# Altium PCB HUB_PCB.PcbDoc
Units mil, origin at the board's own origin, x right, y up, seen from the top; angles counter-clockwise.
Board outline 6000 x 4000 mil, 2 copper layers (Top Layer, Bottom Layer), stack 12.8 mil thick; 64 components, 54 nets, 260 pads, 25 vias.
Unrouted connection lines stored in the file: 176.
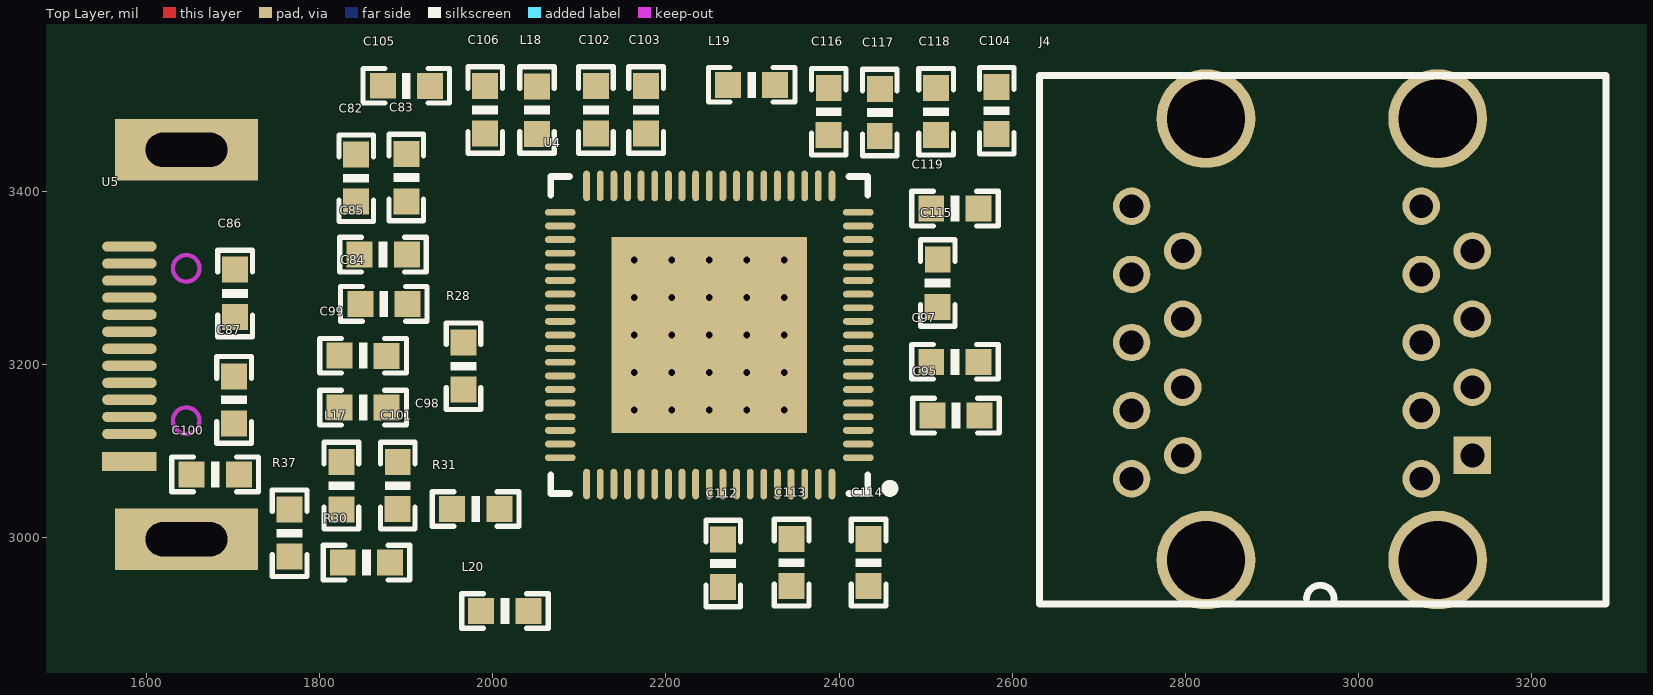
[diagram p0: Top Layer view]
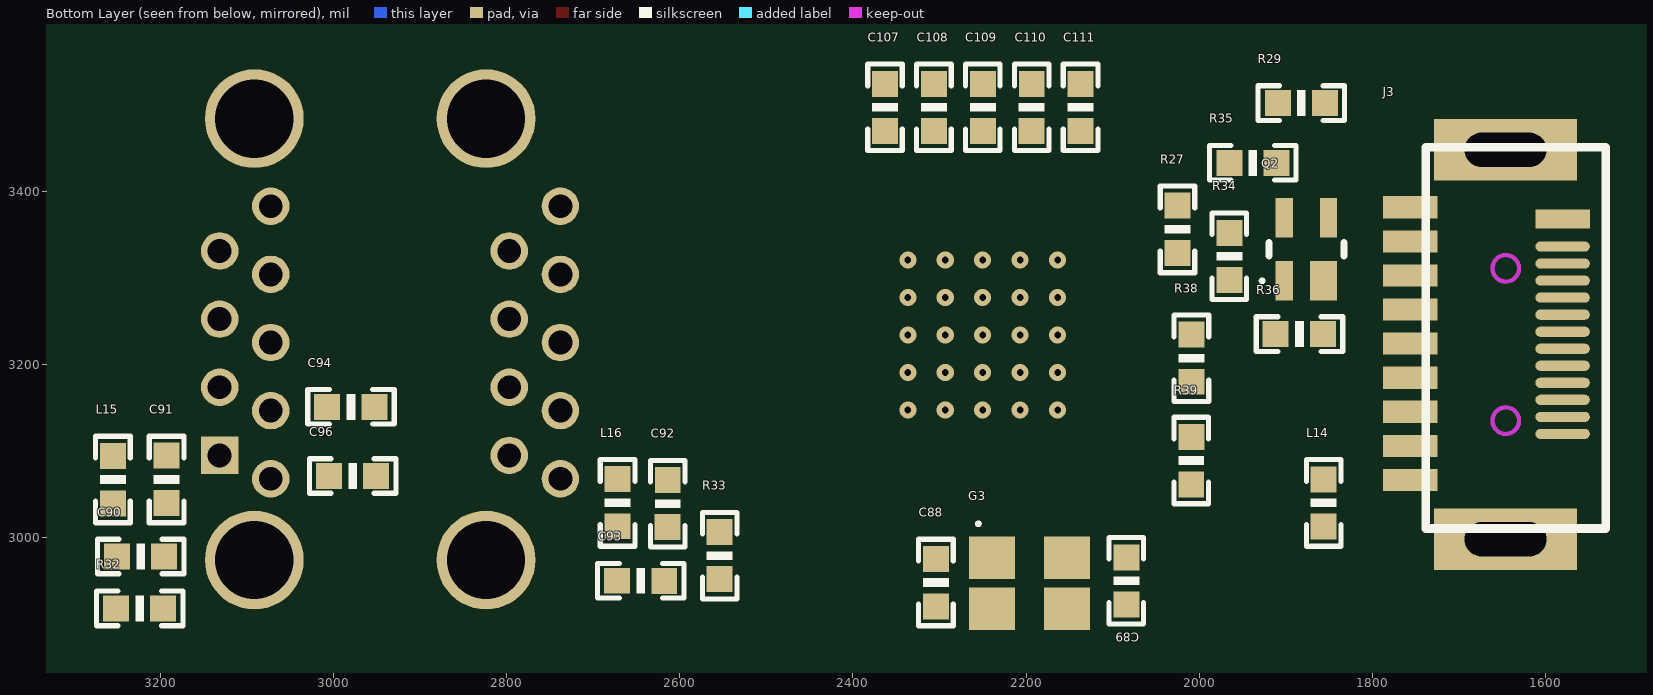
[diagram p1: Bottom Layer view, seen from below]

## Layer stack, top to bottom
Top Solder: solder mask 0.4, Solder Resist, Dk 3.5
Top Layer: signal copper 1.4
Dielectric 1: core 10, FR-4, Dk 4.2
Bottom Layer: signal copper 1.4
Bottom Solder: solder mask 0.4, Solder Resist, Dk 3.5

## Board outline
1000,1000 7000,1000 7000,5000 1000,5000

## Design rules (kind name [scope] priority, off if disabled: settings)
Clearance [All] p1: gap=7
DiffPairsRouting [InDifferentialPairClass('All Differential Pairs')] p1: maxlimit=6 minlimit=6 mostfreqgap=6 toplayer_minwidth=10 toplayer_maxwidth=10 toplayer_prefwidth=10 bottomlayer_minwidth=10 bottomlayer_maxwidth=10 bottomlayer_prefwidth=10 maxuncoupledlength=100
HoleToHoleClearance [All] p1: gap=7 allowstackedmicrovias=TRUE
MinimumSolderMaskSliver [All] p1: minsoldermaskwidth=7
PolygonConnect [All] p1: connectstyle=Relief reliefconductorwidth=10 reliefentries=4 polygonreliefangle="90 Angle" airgapwidth=10
RoutingVias [All] p1: holewidth=15 width=20 viastyle="Through Hole" minholewidth=15 minwidth=20 maxholewidth=15 maxwidth=20
SilkToSolderMaskClearance [IsPad] p1: minsilkscreentomaskgap=7 clearancetoexposedcopper=TRUE
SolderMaskExpansion [All] p1: expansion=4
Width PWR_Width [InNetClass('PWR')] p1: maxlimit=15 minlimit=15 preferedwidth=15 minimp=50.000000 maximp=50.000000 favimp=50.000000 checkconnectedcopper=TRUE
Width [All] p2: maxlimit=8 minlimit=8 preferedwidth=8 minimp=50.000000 maximp=50.000000 favimp=50.000000
26 further rules are at their usual default settings.

## Classes and differential pairs
net class PWR: AVDD12 AVDD33 DV12_1 VBUS VBUS_IN VCC VDP1 VSSP VTC
differential pair RX_DN1: +RX_DN1_P -RX_DN1_N
differential pair RX_DN2: +RX_DN2_P -RX_DN2_N
differential pair RX_TC: +RX_TC_P -RX_TC_N
differential pair RX_UP: +RX_UP_P -RX_UP_N
differential pair TX_DN1: +TX_DN1_P -TX_DN1_N
differential pair TX_DN2: +TX_DN2_P -TX_DN2_N
differential pair TX_TC: +TX_TC_P -TX_TC_N
differential pair TX_UP: +TX_UP_P -TX_UP_N

## Components (designator, comment, footprint, x,y, rotation, side; value= is the part's Value field where it differs from the comment)
C82 "10uF" 0603P 1842,3415 r90 top
C83 "10uF" 0603P 1900,3416 r270 top
C84 "0.1uF" 0603P 1874,3270 r0 top
C85 "0.1uF" 0603P 1873,3327 r0 top
C86 "2.2uF" 0603P 1702,3282 r90 top
C87 "10uF" 0603P 1701,3159 r270 top
C88 "12pF" 0603P 2304,2948 r270 bottom
C89 "12pF" 0603P 2084,2950 r270 bottom
C90 "10uF" 0603P 3223,2978 r0 bottom
C91 "0.1uF" 0603P 3193,3067 r90 bottom
C92 "0.1uF" 0603P 2614,3039 r90 bottom
C93 "10uF" 0603P 2645,2950 r0 bottom
C94 "0.1uF" 0603P 2980,3151 r0 bottom
C95 "0.1uF" 0603P 2535,3141 r0 top
C96 "0.1uF" 0603P 2978,3071 r0 bottom
C97 "0.1uF" 0603P 2534,3203 r180 top
C98 "0.1uF" 0603P 1850,3150 r180 top
C99 "0.1uF" 0603P 1850,3210 r180 top
C100 "10uF" 0603P 1679,3073 r0 top
C101 "0.1uF" 0603P 1890,3060 r90 top
C102 "10uF" 0603P 2119,3494 r90 top
C103 "10uF" 0603P 2177,3494 r90 top
C104 "10uF" 0603P 2582,3493 r90 top
C105 "0.1uF" 0603P 1900,3522 r0 top
C106 "0.1uF" 0603P 1991,3494 r90 top
C107 "0.1uF" 0603P 2362.87,3497 r270 bottom
C108 "0.1uF" 0603P 2306.37,3497 r270 bottom
C109 "0.1uF" 0603P 2249.87,3497 r270 bottom
C110 "0.1uF" 0603P 2193.37,3497 r270 bottom
C111 "0.1uF" 0603P 2136.87,3497 r270 bottom
C112 "0.1uF" 0603P 2266,2970 r90 top
C113 "0.1uF" 0603P 2345,2971 r90 top
C114 "0.1uF" 0603P 2434,2971 r90 top
C115 "0.1uF" 0603P 2514,3294 r270 top
C116 "0.1uF" 0603P 2388,3492 r90 top
C117 "0.1uF" 0603P 2447,3491 r90 top
C118 "0.1uF" 0603P 2512,3492 r90 top
C119 "0.1uF" 0603P 2534,3380 r180 top
G3 "XO" XTAL 2196,2947 r180 bottom
J3 "USB_B" USB3.0_TP 1531,3008 r0 bottom
J4 "USB*2" USB3.0_Double_DIP 2661,2899 r90 top
L14 "220R,2.0A,0.05DCR" 0603P 1856,3040 r270 bottom
L15 "220R,2.0A,0.05DCR" 0603P 3255,3067 r270 bottom
L16 "220R,2.0A,0.05DCR" 0603P 2672,3040 r90 bottom
L17 "220R,2.0A,0.05DCR" 0603P 1825,3060 r270 top
L18 "2.2uH" 0603P 2051,3494 r270 top
L19 "220R,2.0A,0.05DCR" 0603P 2299,3523 r180 top
L20 "2.2uH" 0603P 2014,2915 r180 top
Q2 "MOSFET-N4" SOT-343_N 1876,3333 r90 bottom
R27 "4.7K" 0603P 2025,3356 r90 bottom
R28 "10K" 0603P 1966,3198 r90 top
R29 "20K" 0603P 1882,3502 r180 bottom
R30 "5.1K" 0603P 1854,2971 r180 top
R31 "10K" 0603P 1980,3033 r0 top
R32 "680" 0603P 3224,2918 r0 bottom
R33 "680" 0603P 2554,2979 r90 bottom
R34 "220" 0603P 1965,3325 r270 bottom
R35 "220" 0603P 1938,3433 r180 bottom
R36 "220" 0603P 1884,3235 r0 bottom
R37 "680" 0603P 1765,3005 r90 top
R38 "100K" 0603P 2009,3207 r90 bottom
R39 "100K" 0603P 2009,3089 r270 bottom
U4 "GL3523_S_QFN76" GL3523_QFN76 2250,3234 r180 top
U5 "Type_C" Type-C 1580,3100 r90 top

## Footprints (in the part's own frame and the unit in brackets; to place one, negate y for a bottom-side part, rotate by r counter-clockwise, add the part's x,y. Pads: shape width x height; smd on the part's side, far side on the other; paste and mask are expansions set on the pad)
0603P [mil]
  rect 30x30 smd: 1(-27,0) 2(27.5,-0.06)
  silkscreen extent -50,-20 50,20
GL3523_QFN76 [mm] "QFN, 76-Leads, Body 9.00x9.00mm, Pitch 0.40mm, Thermal Pad 5.75x5.75mm, IPC Medium Density"
  oval 0.9x0.2 smd: 1(-4.375,3.6) 2(-4.375,3.2) 3(-4.375,2.8) 4(-4.375,2.4) 5(-4.375,2) 6(-4.375,1.6) 7(-4.375,1.2) 8(-4.375,0.8) 9(-4.375,0.4) 10(-4.375,0) 11(-4.375,-0.4) 12(-4.375,-0.8) 13(-4.375,-1.2) 14(-4.375,-1.6) 15(-4.375,-2) 16(-4.375,-2.4) 17(-4.375,-2.8) 18(-4.375,-3.2) 19(-4.375,-3.6) 39(4.375,-3.6) 40(4.375,-3.2) 41(4.375,-2.8) 42(4.375,-2.4) 43(4.375,-2) 44(4.375,-1.6) 45(4.375,-1.2) 46(4.375,-0.8) 47(4.375,-0.4) 48(4.375,0) 49(4.375,0.4) 50(4.375,0.8) 51(4.375,1.2) 52(4.375,1.6) 53(4.375,2) 54(4.375,2.4) 55(4.375,2.8) 56(4.375,3.2) 57(4.375,3.6)
  oval 0.2x0.9 smd: 20(-3.6,-4.375) 21(-3.2,-4.375) 22(-2.8,-4.375) 23(-2.4,-4.375) 24(-2,-4.375) 25(-1.6,-4.375) 26(-1.2,-4.375) 27(-0.8,-4.375) 28(-0.4,-4.375) 29(0,-4.375) 30(0.4,-4.375) 31(0.8,-4.375) 32(1.2,-4.375) 33(1.6,-4.375) 34(2,-4.375) 35(2.4,-4.375) 36(2.8,-4.375) 37(3.2,-4.375) 38(3.6,-4.375) 58(3.6,4.375) 59(3.2,4.375) 60(2.8,4.375) 61(2.4,4.375) 62(2,4.375) 63(1.6,4.375) 64(1.2,4.375) 65(0.8,4.375) 66(0.4,4.375) 67(0,4.375) 68(-0.4,4.375) 69(-0.8,4.375) 70(-1.2,4.375) 71(-1.6,4.375) 72(-2,4.375) 73(-2.4,4.375) 74(-2.8,4.375) 75(-3.2,4.375) 76(-3.6,4.375)
  rect 5.75x5.75 smd: 77(0,0)
  silkscreen extent -5.43,-4.65 4.65,4.65
SOT-343_N [mm] "SOT343, 4-Leads, Body 2x1.3 mm, Pitch 1.3mm, Lead Span 2.1mm, IPC Medium Density"
  rect 1.15x0.5 smd: 1(-0.925,0.65) 3(0.925,-0.65) 4(0.925,0.65)
  rect 1.15x0.8 smd: 2(-0.925,-0.5)
  silkscreen extent -0.97,-1.1 0.2,1.35, body extent -0.7,-1.1 0.7,1.1, height 1
Type-C [mm]
  rect 0.55x1.6 smd: A1(-0.31,0)
  oval 0.3x1.6 smd: A2(0.5,0) A3(1,0) A4(1.5,0) A5(2,0) A6(2.5,0) A7(3,0) A8(3.5,0) A9(4,0) A10(4.5,0) A11(5,0) A12(5.5,0) A13(6,0)
  oval 0.3x1.6 smd far side: B2(0.5,0) B3(1,0) B4(1.5,0) B5(2,0) B6(2.5,0) B7(3,0) B8(3.5,0) B9(4,0) B10(4.5,0) B11(5,0) B12(5.5,0) B13(6,0)
  rect 0.55x1.6 smd far side: B14(6.81,0)
USB3.0_Double_DIP [mm]
  rect 1.1x1.1 hole 0.7: 1(4.975,-11.955)
  round 1.1 hole 0.7: 2(6.975,-11.955) 3(8.975,-11.955) 4(10.975,-11.955) 5(12.289,-10.455) 6(10.289,-10.455) 7(8.289,-10.455) 8(6.289,-10.455) 9(4.289,-10.455) 10(4.975,-3.455) 11(6.975,-3.455) 12(8.975,-3.455) 13(10.975,-3.455) 14(12.289,-1.955) 15(10.289,-1.955) 16(8.289,-1.955) 17(6.289,-1.955) 18(4.289,-1.955)
  round 2.9 hole 2.3: A(1.905,-4.138) B(1.905,-10.938) C(14.859,-4.138) D(14.859,-10.938)
  silkscreen extent 0.61,-15.88 16.13,0.75
USB3.0_TP [mm]
  rect 4.2x1.8 hole 1 slot 2.4 at 0 deg: 0(2.921,-11.176) 0(2.921,0.254)
  rect 1.6x0.65 smd: 1(5.715,-1.487) 2(5.715,-2.488) 3(5.715,-3.488) 4(5.715,-4.488) 5(5.715,-5.488) 6(5.715,-6.488) 7(5.715,-7.488) 8(5.715,-8.488) 9(5.715,-9.488)
  Keep-Out Layer circle w0.127: c2.912,-7.696 r0.39
  Keep-Out Layer circle w0.127: c2.912,-3.226 r0.39
  silkscreen extent -0.03,-11.25 5.26,-0.06
XTAL [mm] "DFN, 4-Leads, Body 2.50x3.20mm, Pitch 2.20mm, IPC Medium Density"
  rect 1.35x1.25 smd: 1(-1.1,0.75) 2(-1.1,-0.75) 3(1.1,-0.75) 4(1.1,0.75)
  silkscreen extent -1.55,1.7 -1.45,1.8

## Part data
C82 C83 C84 C85 C86 C87 C88 C89 C90 C91 C92 C93 C94 C95 C96 C97 C98 C99 C100 C101 C102 C103 C104 C105 C106 C107 C108 C109 C110 C111 C112 C113 C114 C115 C116 C117 C118 C119: library part C
G3: "25M XO"
J3: "USB3.0_B"
L14 L15 L16 L17 L18 L19 L20: library part L
Q2: "N-Channel MOSFET, Externally Terminated Substrate"
R27 R28 R29 R30 R31 R32 R33 R34 R35 R36 R37 R38 R39: library part R

## Via types
v1: diameter 19.68, hole 7.87, Top Layer to Bottom Layer, 25 vias

## Nets (pads, with @x,y where several pads share a name; then routed paths per layer and width w, separated by ;. In a path a pad name is that pad's centre, name@x,y a point inside that pad or via, vN(x,y) a via of type N, cw(c..) or ccw(c..) an arc to the next point about the centre after c; other vN are vias at no path point)
AVDD12: C104.2 C112.2 C113.2 C114.2 C115.2 C116.2 C117.2 C118.2 C119.2 L19.1 U4.1 U4.7 U4.12 U4.19 U4.24 U4.62 U4.68 U4.73
AVDD33: C107.2 C108.2 C109.2 C110.2 C111.2 U4.2 U4.29 U4.41 U4.59 U4.63 U4.76
CC1: U4.50 U5.A6
CC2: U4.49 U5.B6
CHIPEN: R27.1 U4.42
DM0: J3.2 U4.65 U5.A8 U5.B8
DM2: J4.2 U4.28
DM3: J4.17 U4.4
DP0: J3.3 U4.64 U5.A7 U5.B7
DP2: J4.3 U4.27
DP3: J4.16 U4.3
DV12_1: C102.2 C103.2 C105.2 C106.2 L18.1 L19.2 U4.30 U4.35 U4.51
NetC84_1: C84.1 J3.5
NetC85_1: C85.1 J3.6
NetC87_2: C87.2 J3.1 L14.1
NetC91_2: C91.2 J4.1 L15.1
NetC92_2: C92.2 J4.18 L16.2
NetC94_2: C94.2 J4.8
NetC95_1: C95.1 J4.11
NetC96_2: C96.2 J4.9
NetC97_1: C97.1 J4.10
NetC98_2: C98.2 U5.A3
NetC99_2: C99.2 U5.A4
NetQ2_1: Q2.1 R34.2
NetQ2_2: Q2.2 R36.1
NetQ2_3: Q2.3 Q2.4 R35.2
PGANG: R38.1 R39.1 U4.57
RESET: R28.1 U4.52
RTERM: R29.1 U4.43
RX_DN1_N: J4.5 U4.20
RX_DN1_P: J4.6 U4.21
RX_DN2_N: J4.14 U4.8
RX_DN2_P: J4.13 U4.9
RX_TC_N: U4.71 U5.B11
RX_TC_P: U4.72 U5.B12
RX_UP_N: J3.8 U4.69
RX_UP_P: J3.9 U4.70
SW: L18.2 U4.38
TX_DN1_N: C94.1 U4.17
TX_DN1_P: C96.1 U4.18
TX_DN2_N: C95.2 U4.5
TX_DN2_P: C97.2 U4.6
TX_TC_N: C99.1 U4.75
TX_TC_P: C98.1 U4.74
TX_UP_N: C84.2 U4.66
TX_UP_P: C85.2 U4.67
VBUS: C86.2 C100.2 L14.2 L17.2 R28.2 R30.2 R36.2 R37.2
VBUS_IN: R30.1 R31.2 U4.58
VCC: C82.1 C83.2 L20.2 R27.2 R34.1 R35.1 R38.2 U4.40 U4.48
VDP1: C90.2 C93.2 L15.2 L16.1 L20.1 R32.2 R33.2
VSSP: C82.2 C83.1 C86.1 C87.1 C88.2 C89.1 C90.1 C91.1 C92.1 C93.1 C100.1 C101.1 C102.1 C103.1 C104.1 C105.1 C106.1 C107.1 C108.1 C109.1 C110.1 C111.1 C112.1 C113.1 C114.1 C115.1 C116.1 C117.1 C118.1 C119.1 G3.2 G3.4 J3.0 J3.4 J3.7 J4.4 J4.7 J4.12 J4.15 J4.A J4.B J4.C J4.D R29.2 R31.1 R32.1 R33.1 R37.1 R39.2 U4.37 U4.39 U5.A1 U5.A2 U5.A13 U5.B2 U5.B13 U5.B14
VTC: C101.2 L17.1 U5.A5 U5.A10 U5.B5 U5.B10
X1: C88.1 G3.1 U4.61
X2: C89.2 G3.3 U4.60
pads on no net: U4.10 U4.11 U4.13 U4.14 U4.15 U4.16 U4.22 U4.23 U4.25 U4.26 U4.31 U4.32 U4.33 U4.34 U4.36 U4.44 U4.45 U4.46 U4.47 U4.53 U4.54 U4.55 U4.56 U4.77 U5.A9 U5.A11 U5.A12 U5.B3 U5.B4 U5.B9
copper on no net:
  other v1: 2163.39,3147.39 2206.69,3147.39 2250,3147.39 2293.31,3147.39 2336.61,3147.39 2163.39,3190.69 2206.69,3190.69 2250,3190.69 2293.31,3190.69 2336.61,3190.69 2163.39,3234 2206.69,3234 2250,3234 2293.31,3234 2336.61,3234 2163.39,3277.31 2206.69,3277.31 2250,3277.31 2293.31,3277.31 2336.61,3277.31 2163.39,3320.61 2206.69,3320.61 2250,3320.61 2293.31,3320.61 2336.61,3320.61